# Altium PCB ILI9341_Pcb.PcbDoc
Units mil, origin at the board's own origin, x right, y up, seen from the top; angles counter-clockwise.
Board outline 2669.45 x 1586.74 mil, 2 copper layers (Top Layer, Bottom Layer); 13 components, 13 nets, 77 pads, 20 vias.
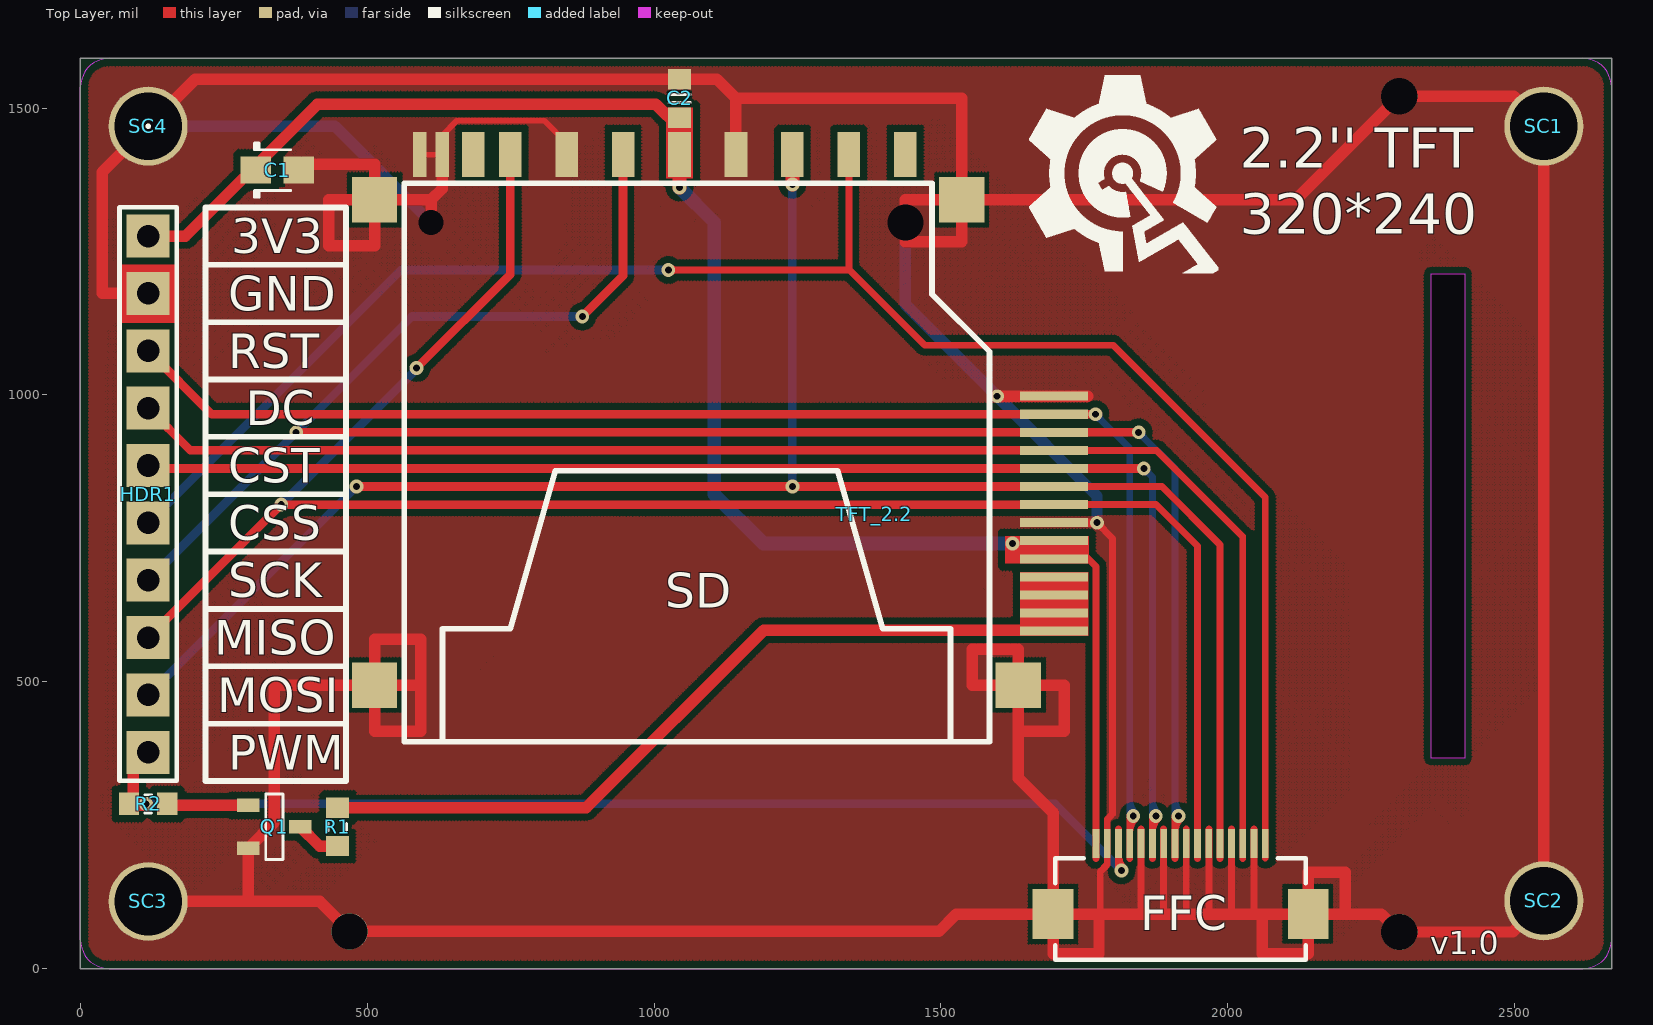
[diagram p0: Top Layer view]
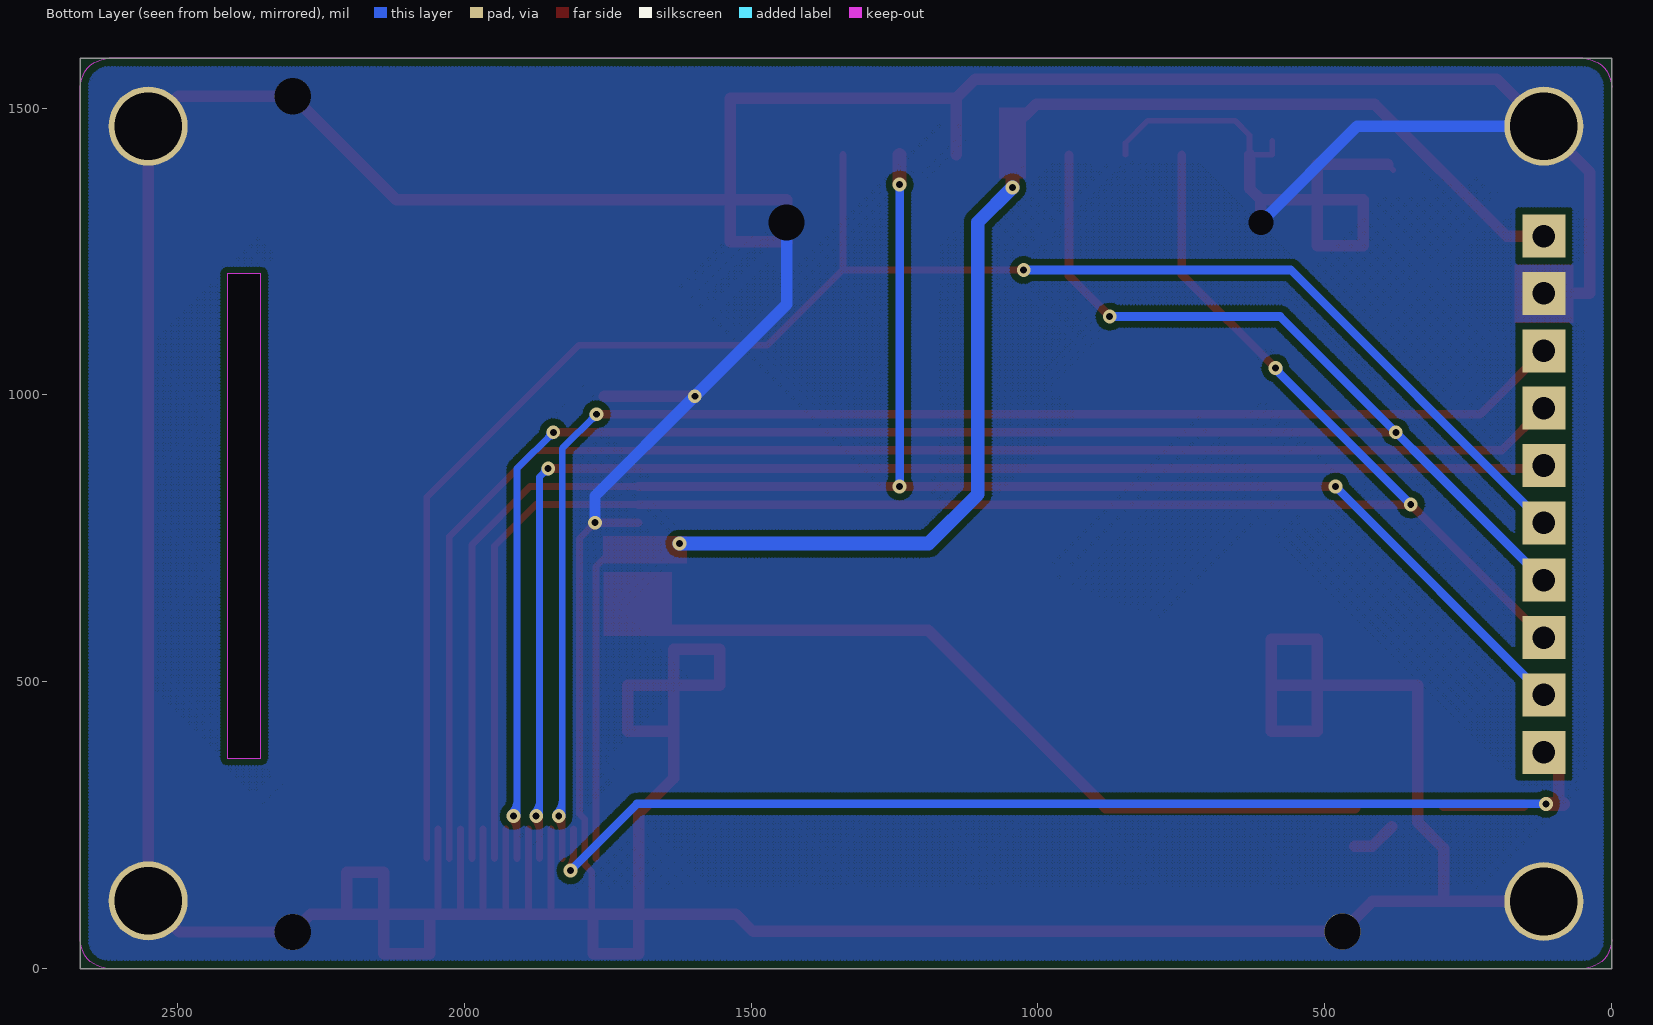
[diagram p1: Bottom Layer view, seen from below]

## Layer stack, top to bottom
Top Layer: signal copper 1.4
Dielectric: dielectric 12.6, FR-4, Dk 4.8
Bottom Layer: signal copper 1.4

## Board outline
0,1586.74 2669.45,1586.74 2669.45,0 0,0
cut-out: 2355,1211 2413.11,1211 2413.11,366.78 2355,366.78

## Design rules (kind name [scope] priority, off if disabled: settings)
Clearance ClearancePlane [InPolygon] p1: gap=12
Clearance [All] p2: gap=6
ComponentClearance [All] p1: gap=0 collisioncheckmode=3 verticalgap=0 showdistances=FALSE
HoleSize [All] p1: absolutevalues=TRUE maxlimit=120 minlimit=1 maxpercent=80.000 minpercent=20.000
HoleToHoleClearance [All] p1: gap=5 allowstackedmicrovias=TRUE
MinimumSolderMaskSliver [All] p1: minsoldermaskwidth=5
PlaneClearance [All] p1: clearance=0
PlaneConnect [All] p1: planeconnectstyle=Direct reliefexpansion=20 reliefentries=4 reliefconductorwidth=10 reliefairgap=10
PolygonConnect [All] p1: connectstyle=Direct reliefconductorwidth=10 reliefentries=4 polygonreliefangle="90 Angle" airgapwidth=10
RoutingVias [All] p1: holewidth=12 width=20 viastyle="Through Hole" minholewidth=12 minwidth=20 maxholewidth=30 maxwidth=60
SilkToSilkClearance [All] p1: silktosilkclearance=0
SilkToSolderMaskClearance [IsPad] p1: minsilkscreentomaskgap=2 clearancetoexposedcopper=TRUE
SolderMaskExpansion [All] p1: expansion=0
UnConnectedPin [All] p1:
Width [All] p1: maxlimit=30 minlimit=6 preferedwidth=10
20 further rules are at their usual default settings.

## Components (designator, comment, footprint, x,y, rotation, side; value= is the part's Value field where it differs from the comment)
C1 "Cap_Tan_0805" CAP_TAN_P0805 343.11,1392 r0 top
C2 "Cap_0603" CAP_0603 1044.45,1517 r270 top
FFC "FFC_0.5_16" FFC_0.5_16 1918.11,154 r0 top locked (schematic designator FFC16)
HDR1 "HDR1X10_180_2.54" HDR1X10_180_2.54 118.11,1277 r270 top
Q1 "BJT_NPN" SOT23-3 338.11,247 r0 top
R1 "Res_0603" RES_0603 448.11,247 r90 top
R2 "Res_0603" RES_0603 118.11,287 r0 top
SC1 "M3" SCRREW_M3 2551.34,1468.63 r0 top
SC2 "M3" SCRREW_M3 2551.34,118.11 r0 top
SC3 "M3" SCRREW_M3 118.11,117 r0 top
SC4 "M3" SCRREW_M3 118.11,1468.63 r0 top
SD "SD_Card" SD_Card 1339.72,1419 r270 top locked
TFT_2.2 "TFT_2.2_ILI9341" TFT_2.2_ILI9341 2421.34,1582.74 r270 bottom locked

## Footprints (in the part's own frame and the unit in brackets; to place one, negate y for a bottom-side part, rotate by r counter-clockwise, add the part's x,y. Pads: shape width x height; smd on the part's side, far side on the other; paste and mask are expansions set on the pad)
CAP_0603 [mm] "Chip Capacitor, Body 1.6x0.8mm, 0603, IPC Medium Density"
  rect 0.9x1 smd: 1(-0.85,0) 2(0.85,0)
  Top Layer pour cut-out: -0.4,0.6 0.4,0.6 0.4,-0.6 -0.4,-0.6
  silkscreen extent -0.18,-0.48 0.18,0.48, body extent -0.85,-0.45 0.85,0.45, height 0.89
CAP_TAN_P0805 [mm] "Molded body capacitor, Body 2.0x1.2mm, 0805, IPC Medium Density"
  rect 1.35x1.2 smd: 1(-0.95,0) 2(0.95,0)
  Top Layer pour cut-out: -0.4,0.8 0.4,0.8 0.4,-0.8 -0.4,-0.8
  silkscreen extent -1,-1.2 0.6,1.2, body extent -1.02,-0.67 1.03,0.68, height 1.5
FFC_0.5_16 [mm] "Connector; FH12 Series; 16 Position; 0.5mm Spaced Bottom Contact"
  rect 1.8x2.2 smd: 0(-5.65,-1.498) 0(5.65,-1.498)
  rect 0.3x1.3 smd: 1(-3.75,1.625) 2(-3.25,1.625) 3(-2.75,1.625) 4(-2.25,1.625) 5(-1.75,1.625) 6(-1.25,1.625) 7(-0.75,1.625) 8(-0.25,1.625) 9(0.25,1.625) 10(0.75,1.625) 11(1.25,1.625) 12(1.75,1.625) 13(2.25,1.625) 14(2.75,1.625) 15(3.25,1.625) 16(3.75,1.625)
  silkscreen extent -5.55,-3.53 5.55,0.97, body extent -6.75,-3.93 6.75,1.41, height 2.08
HDR1X10_180_2.54 [mm] "Connector; Header; 8 Position"
  rect 1.905x1.905 hole 1: 1(0,0) 2(2.54,0) 3(5.08,0) 4(7.62,0) 5(10.16,0) 6(12.7,0) 7(15.24,0) 8(17.78,0) 9(20.32,0) 10(22.86,0)
  silkscreen extent -1.27,-1.27 24.13,1.27, body extent -1.27,-1.27 24.13,1.27, height 7.58
RES_0603 [mm]
  rect 0.9x1 smd: 1(-0.85,0) 2(0.85,0)
  Top Layer pour cut-out: -0.4,0.6 0.4,0.6 0.4,-0.6 -0.4,-0.6
  silkscreen extent -0.15,-0.41 0.15,0.41, body extent -0.87,-0.47 0.88,0.48, height 0.54
SCRREW_M3 [mm]
  round 3.5 hole 3: 0(0,0)
SD_Card [mm]
  rect 2x1 smd: 1(0,0) 2(0,-2.5) 3(0,-5) 4(0,-7.5) 5(0,-10) 6(0,-12.5) 7(0,-15) 8(0,-16.625) 9(0,2.5)
  rect 2x2 smd: 3(2,5) 3(2,-21) 3(23.5,7.5) 3(23.5,-21)
  round 1.5 hole 1.6: 3(3,2.5)
  round 1 hole 1.1: 3(3,-18.5)
  rect 2x0.6 smd: 10(0,-18) 11(0,-19)
  silkscreen extent 1.27,-19.68 26,6.22, body extent -0.2,-20.85 37.08,7.12, height 3.32
SOT23-3 [mm] "SOT23, 3 pin"
  rect 1x0.6 smd: 1(-1.15,0.95) 2(-1.15,-0.95) 3(1.15,0)
  silkscreen extent -0.38,-1.45 0.38,1.45, body extent -1.4,-1.45 1.4,1.45, height 1.29
TFT_2.2_ILI9341 [mm]
  round 1.6 hole 1.6 unplated: 0(1.575,3.099) 0(38.557,49.581) 0(38.583,3.099)
  rect 0.4x3 smd far side: 1(14.856,18.39) 2(15.656,18.39) 3(16.456,18.39) 4(17.256,18.39) 5(18.056,18.39) 6(18.856,18.39) 7(19.656,18.39) 8(20.456,18.39) 9(21.256,18.39) 10(22.056,18.39) 11(22.856,18.39) 12(23.656,18.39) 13(24.456,18.39) 14(25.256,18.39)

## Part data
C1 C2: "Capacitor"
FFC: "FFC"
HDR1: "Header"
Q1: "Transistor"
R1 R2: "Resistor"
SC1 SC2 SC3 SC4: library part Screw_M3, "Screw"
SD: "SD"
TFT_2.2: "Module"

## Via types
v1: diameter 24, hole 12, Top Layer to Bottom Layer, 20 vias

## Nets (pads, with @x,y where several pads share a name; then routed paths per layer and width w, separated by ;. In a path a pad name is that pad's centre, name@x,y a point inside that pad or via, vN(x,y) a via of type N, cw(c..) or ccw(c..) an arc to the next point about the centre after c; other vN are vias at no path point)
3V3: C1.1 C2.2 FFC.1 HDR1.1 SD.4 TFT_2.2.9 TFT_2.2.10 | length 2858.9
  Top Layer w12: TFT_2.2.9 1725.21,745.9 1770.47,700.64 1770.47,192
  Top Layer w20: HDR1.1 183.11,1277 413.11,1507 1003.11,1507 1044.45,1465.66 SD.4
  Top Layer w24: v1(1044.45,1361.74) SD.4
  Bottom Layer w24: v1(1044.45,1361.74) 1105,1301.19 1105,826.74 1190.74,741 v1(1625.11,741)
CSS: FFC.16 HDR1.6 SD.1 | length 3147.2
  Top Layer w12: v1(1025,1217.92) 1340.82,1217.92 ; v1@1029.24,1213.68 cw(c1039.49,1203.43) 1039.49,1217.92 cw(c1039.49,1232.41) v1@1029.24,1222.16 ; SD.1 1339.72,1219.02 1472,1086.74 1800,1086.74 2065.75,820.99 FFC.16@2065.75,192.74
  Bottom Layer w15: HDR1.6 559.03,1217.92 v1(1025,1217.92)
CST: FFC.6 HDR1.5 TFT_2.2.5 | length 2486.5
  Top Layer w12: 1868.9,192 v1@1868.9,266 ; FFC.6@1868.9,237.03 cw(c1903.87,237.03) v1@1879.14,261.76
  Top Layer w15: HDR1.5@123.22,871.89 TFT_2.2.5 v1@1846,871.89
  Bottom Layer w12: v1@1854,865.89 cw(c1854,851.4) 1864.24,861.65 cw(c1874.49,871.89) v1@1860,871.89 ; v1(1854,871.89) 1868.9,856.99 v1@1868.9,266 ; 1868.9,294.97 ccw(c1903.87,294.97) v1@1879.14,270.24
  other v1: 1874.9,266
DC: FFC.14 HDR1.4 TFT_2.2.4 | length 2562.3
  Top Layer w12: TFT_2.2.4 1876.49,903.39 2026.38,753.5 2026.38,192
  Top Layer w15: HDR1.4 191.72,903.39 TFT_2.2.4
GND: C1.2 C2.1 FFC.0 FFC.2 FFC.5 FFC.7 FFC.9 FFC.11 FFC.13 FFC.15 HDR1.2 Q1.2 SC1.0 SC2.0 SC3.0 SC4.0 SD.3 SD.6 SD.10 SD.11 TFT_2.2.0 TFT_2.2.1 TFT_2.2.8 | length 14367.2
  Top Layer w10: C1.2 C1.2@390.51,1402 ; SD.11@591.69,1443.42 SD.11 SD.10 631.06,1452.95 656.11,1478 809.11,1478 847.6,1439.51 SD.6
  Top Layer w12: v1@1772.34,771.4 cw(c1772.34,756.92) 1782.58,767.16 cw(c1792.82,777.4) v1@1778.34,777.4 ; v1(1772.34,777.4) 1799.66,750.08 1799.66,269.07 1790.16,259.57 1790.16,180.96 1777.91,168.71 1777.91,98 ; 1849.21,93 FFC.5@1849.21,243 ; 1888.58,93 FFC.7@1888.58,243 ; 1927.95,93 FFC.9@1927.95,243 ; 1967.32,93 FFC.11@1967.32,243 ; 2006.69,93 FFC.13@2006.69,243 ; 2046.06,93 FFC.15@2046.06,243
  Top Layer w15: TFT_2.2.8 v1(1772.34,777.4)
  Top Layer w20: HDR1.2 38.11,1177 38.11,1388.63 SC4.0 199.94,1550.46 C2.1 1109.65,1550.46 1142.87,1517.24 ; SC3.0@118.39,117.28 292.83,117.28 Q1.2 338.11,254.87 338.11,493.8 SD.3@512.95,493.8 ; 292.83,117 417.08,117 469.34,64.74 1496.85,64.74 1527.13,95.02 FFC.0@1695.67,95.02 ; C1.2@390.51,1402 512.95,1402 SD.3@512.95,1340.26 ; SD.3@611.38,1300.89 611.38,1340.26 ; SD.10 631.06,1359.94 611.38,1340.26 ; SD.3@1142.87,1419 1142.87,1517.24 ; v1(1598.24,997.87) TFT_2.2.1@1756.11,997.87 ; 1635,413.64 1715.16,413.64 1715.16,493.8 SD.3@1635,493.8 ; 1775.83,95 1775.83,26 1695.67,26 FFC.0@1695.67,95.02 ; 2060.39,94 2060.39,26 2140.55,26 FFC.0@2140.55,95.02 ; 2205.11,95.02 2205.11,168 2140.55,168 FFC.0@2140.55,95.02 ; SD.3@512.95,493.8 593.11,493.8 ; SD.3@512.95,493.8 512.95,573.96 593.11,573.96 593.11,493.8 ; SD.3@512.95,493.8 512.95,413.64 593.11,413.64 593.11,493.8 ; SD.3@512.95,1340.26 611.38,1340.26 ; SD.3@512.95,1340.26 512.95,1260.1 432.79,1260.1 432.79,1340.26 SD.3@512.95,1340.26 ; 1142.87,1517.24 1536.57,1517.24 SD.3@1536.57,1340.26 ; SD.3@1536.57,1340.26 2118.86,1340.26 2299.34,1520.74 2499.23,1520.74 SC1.0 SC2.0 2496.97,63.74 2299.34,63.74 2268.05,95.02 FFC.0@2140.55,95.02 ; SD.3@1536.57,1340.26 1438.15,1340.26 1438.15,1300.89 1438.15,1266.74 1536.57,1266.74 SD.3@1536.57,1340.26 ; SD.3@1635,493.8 1635,332.11 1695.67,271.44 FFC.0@1695.67,95.02 ; SD.3@1635,493.8 1554.84,493.8 1554.84,557 1635,557 SD.3@1635,493.8 ; FFC.0@1695.67,95.02 FFC.0@2140.55,95.02
  Bottom Layer w20: SC4.0 443.64,1468.63 SD.3@611.38,1300.89 ; SD.3@1438.15,1300.89 1438.15,1157.96 v1(1598.24,997.87) 1772.34,823.77 v1(1772.34,777.4)
LEDK: R1.2 TFT_2.2.11 TFT_2.2.12 TFT_2.2.13 TFT_2.2.14 | length 1327.6
  Top Layer w20: R1.2 881.57,280.46 1191.11,590 TFT_2.2.14@1647.53,590
MISO: FFC.10 HDR1.8 SD.7 TFT_2.2.7 | length 3287.2
  Top Layer w12: TFT_2.2.7 1875.21,808.9 1947.64,736.47 1947.64,192
  Top Layer w15: HDR1.8 v1(350.01,808.9) TFT_2.2.7 ; v1(586.11,1047) 749.17,1210.06 SD.7
  Bottom Layer w15: v1(350.01,808.9) v1@587.11,1046 ; 577.01,1035.9 ccw(c565.92,1047) v1@581.61,1047
MOSI: FFC.12 HDR1.9 SD.2 TFT_2.2.6 | length 3186.9
  Top Layer w12: TFT_2.2.6 1885.5,840.39 1987.01,738.88 1987.01,192
  Top Layer w15: v1(481.5,840.39) TFT_2.2.6
  Top Layer w24: v1(1241.3,1366.74) SD.2
  Bottom Layer w15: HDR1.9 v1(481.5,840.39) ; v1(1241.3,840.44) v1(1241.3,1366.74)
NetQ1_1: Q1.1 R2.2 | length 138.7
  Top Layer w20: R2.2@154.17,284.4 Q1.1
NetQ1_3: Q1.3 R1.1 | length 78.6
  Top Layer w20: Q1.3 416.85,213.54 R1.1
PWM: FFC.3 HDR1.10 R2.1 | length 1971.8
  Top Layer w12: FFC.3@1809.84,198.2 ccw(c1842.31,198.2) v1@1819.35,175.24 ; FFC.3@1809.84,243 1809.84,176.27 v1(1815.11,171)
  Top Layer w20: R2.1@91.88,294.23 91.88,350.77 HDR1.10
  Top Layer w24: R2.1 v1(114.36,287)
  Bottom Layer w15: v1(114.36,287) 1699.11,287 v1(1815.11,171)
RST: FFC.4 HDR1.3 TFT_2.2.2 | length 2574.1
  Top Layer w12: 1829.53,192 FFC.4 v1@1829.53,266 ; FFC.4@1829.53,237.03 cw(c1864.5,237.03) v1@1839.77,261.76
  Top Layer w15: HDR1.3 228.73,966.38 TFT_2.2.2 v1(1769.49,966.38)
  Bottom Layer w12: v1@1769.49,960.38 cw(c1769.49,945.89) 1779.73,956.14 cw(c1789.97,966.38) v1@1775.49,966.38 ; v1(1769.49,966.38) 1829.53,906.34 v1@1829.53,266 ; 1829.53,294.97 ccw(c1864.5,294.97) v1@1839.77,270.24
  other v1: 1835.53,266
SCK: FFC.8 HDR1.7 SD.5 TFT_2.2.3 | length 3574.7
  Top Layer w12: 1908.27,192 v1@1908.27,266 ; FFC.8@1908.27,237.03 cw(c1943.24,237.03) v1@1918.51,261.76
  Top Layer w15: v1(376.11,934.88) TFT_2.2.3 v1(1844.99,934.88) ; v1(875,1136.74) 946.02,1207.76 SD.5
  Bottom Layer w12: v1@1844.99,928.88 cw(c1844.99,914.4) 1855.23,924.64 cw(c1865.48,934.88) v1@1850.99,934.88 ; v1(1844.99,934.88) 1908.27,871.61 v1@1908.27,266 ; 1908.27,294.97 ccw(c1943.24,294.97) v1@1918.51,270.24
  Bottom Layer w15: HDR1.7 577.85,1136.74 v1(875,1136.74)
  other v1: 1914.27,266
pads on no net: SD.8 SD.9

## Polygon pours and split planes (outlines as drawn)
GND on Top Layer "Top Layer-No Net" (hatched 45Degree grid 4 track 4, remove dead copper, pour order 4): 0,1586.74 2670,1586.74 2670,-3.26 0,-3.26
GND on Bottom Layer "Top Layer-No Net" (hatched 45Degree grid 4 track 4, remove dead copper, pour order 3): 0,1586.74 2670,1586.74 2670,-3.26 0,-3.26

## Keep-outs
Keep-Out Layer:
  lines w2: 0,50 ccw(c50,50) 50,0 2619.45,0 ccw(c2619.45,50) 2669.45,50 2669.45,1536.74 ccw(c2619.45,1536.74) 2619.45,1586.74 50,1586.74 ccw(c50,1536.74) 0,1536.74 0,50

## Other copper
Top Layer:
  rectangle net 3V3: 1612.11,706 1758.11,754
  rectangle net LEDK: 1638.11,580 1757.11,691
  rectangle net 3V3: 1020.83,1377 1068.07,1501.25
  rectangle net GND: 66.61,1125.74 169.61,1227.74
  pour cut-out: 463.11,1390 563.11,1390 563.11,1290 463.11,1290
  pour cut-out: 1487.11,1390 1586.11,1390 1586.11,1290 1487.11,1290
  pour cut-out: 463.11,544 563.11,544 563.11,444 463.11,444
  pour cut-out: 1585.11,544 1685.11,544 1685.11,444 1585.11,444
  pour cut-out: 1650.11,149 1741.11,149 1741.11,41 1650.11,41
  pour cut-out: 2094.11,149 2186.11,149 2186.11,42 2094.11,42
  pour cut-out: 68.11,1327 168.11,1327 168.11,327 68.11,327
  pour cut-out: 1758.11,254.01 2078.11,253.69 2078.11,182 1758.11,182

## Silkscreen, mask and mechanical layers (free items; w line width, h text height)
Top Overlay:
  drawing of 3081 lines, arcs and shapes, not listed
  text "2.2'' TFT" at 2021.55,1372.98 h120
  text "320*240" at 2021.55,1257.98 h120
  text "3V3" at 263.11,1247 h60
  text "GND" at 258.11,1147 h60
  text "RST" at 258.11,1047 h60
  text "DC" at 288.11,947 h60
  text "CST" at 258.11,847 h60
  text "CSS" at 258.11,747 h60
  text "SCK" at 258.11,647 h60
  text "MISO" at 233.11,547 h60
  text "MOSI" at 238.11,447 h60
  text "PWM" at 258.11,347 h60
  text "v1.0" at 2353,25 h40
Mechanical 1:
  the board outline again, w0
Mechanical 13:
  circle w1: c2551.34,118.11 r118.11
  circle w1: c2551.34,1468.63 r118.11
  circle w1: c118.11,117 r118.11
  circle w1: c118.11,1468.63 r118.11

## Dimensions
248.11,1582.74 to 2421.34,1582.74 on Mechanical 13
0,1586.74 to 0,0 on Mechanical 13
0,1586.74 to 2669.45,1586.74 on Mechanical 13